# Altium PCB PCB1.PcbDoc
Units mm, origin at the board's own origin, x right, y up, seen from the top; angles counter-clockwise.
Board outline 40.51 x 73.91 mm, 2 copper layers (Top Layer, Bottom Layer), stack 1.671 mm thick; 26 components, 14 nets, 62 pads, 0 vias.
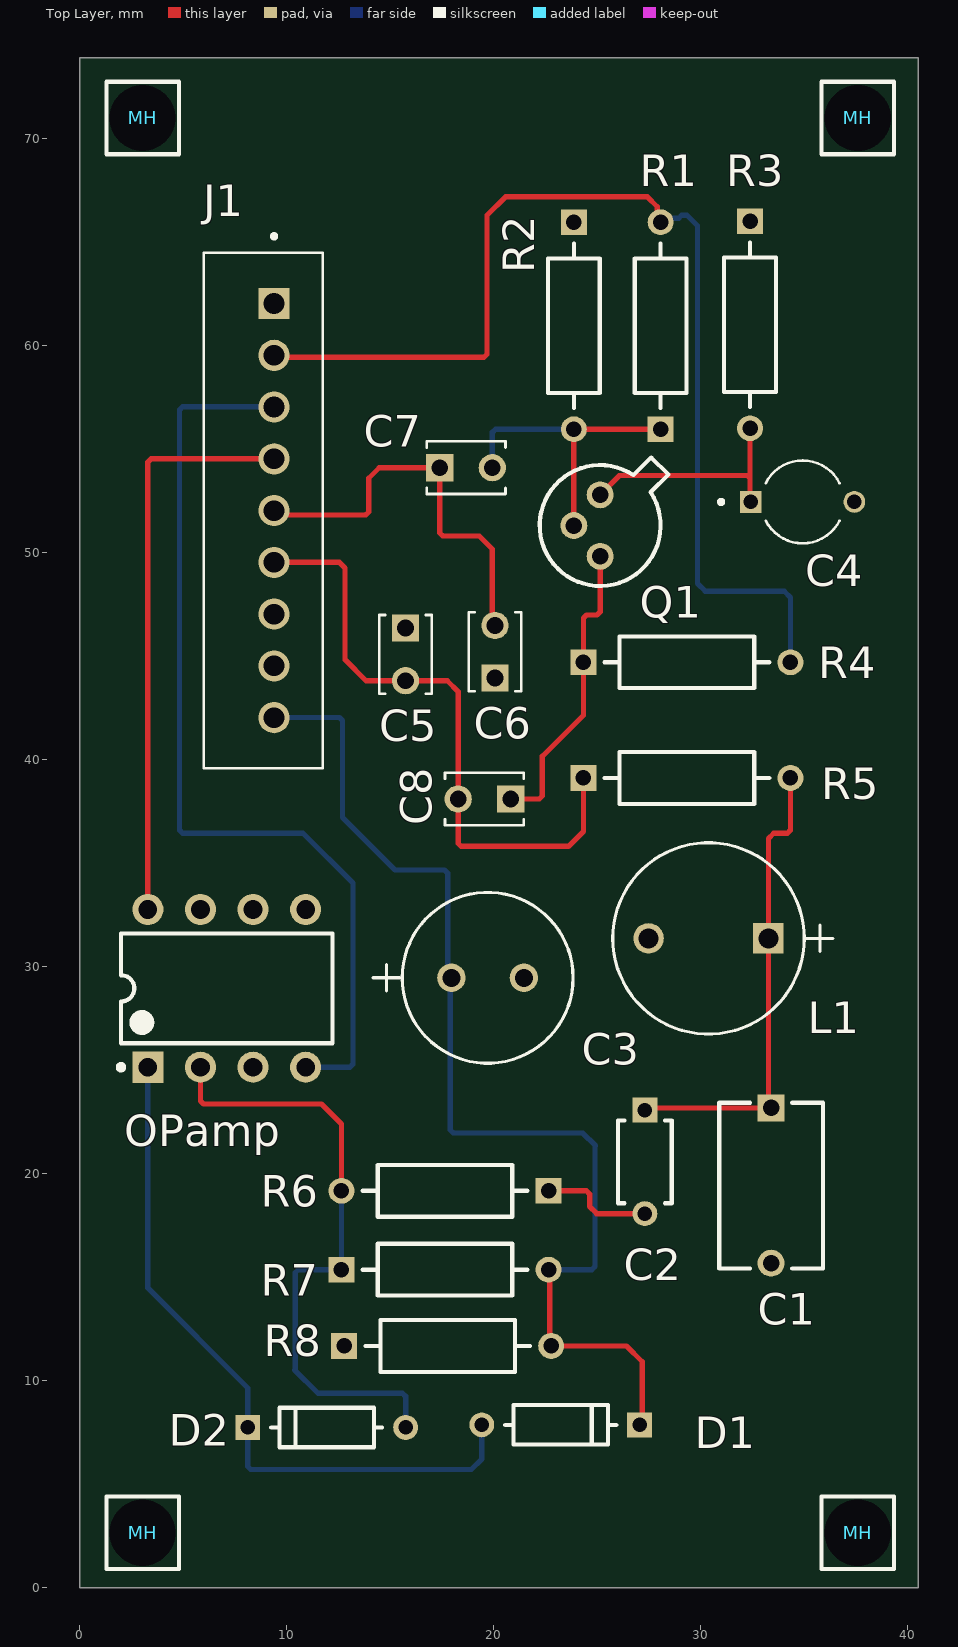
[diagram p0: Top Layer view]
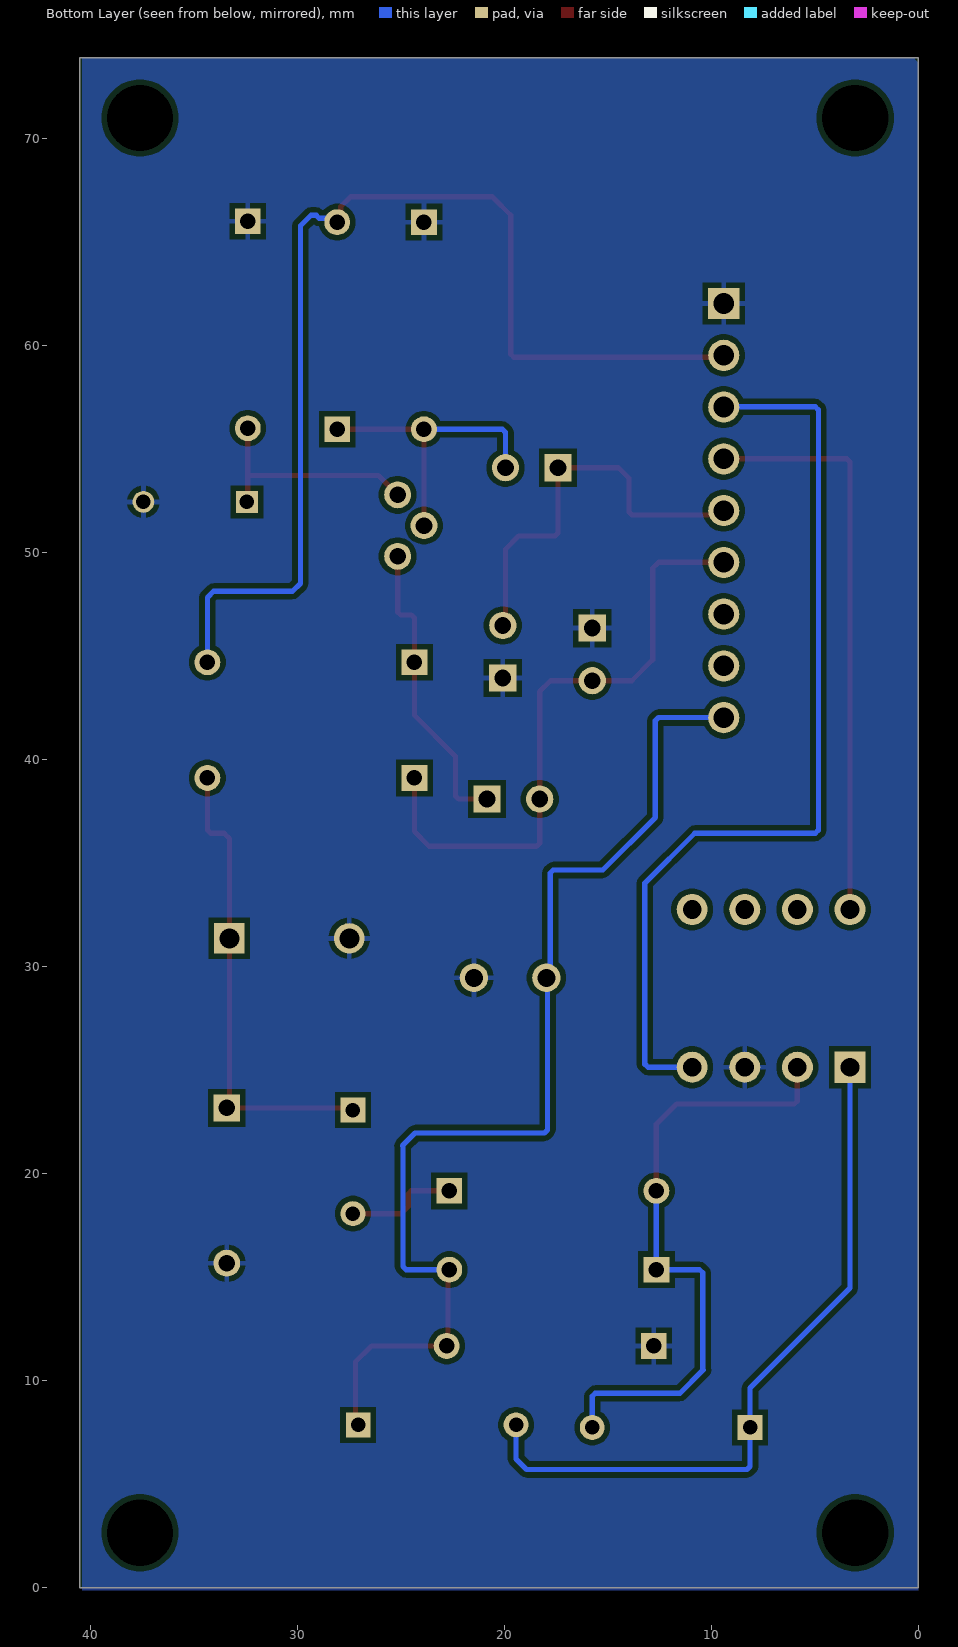
[diagram p1: Bottom Layer view, seen from below]
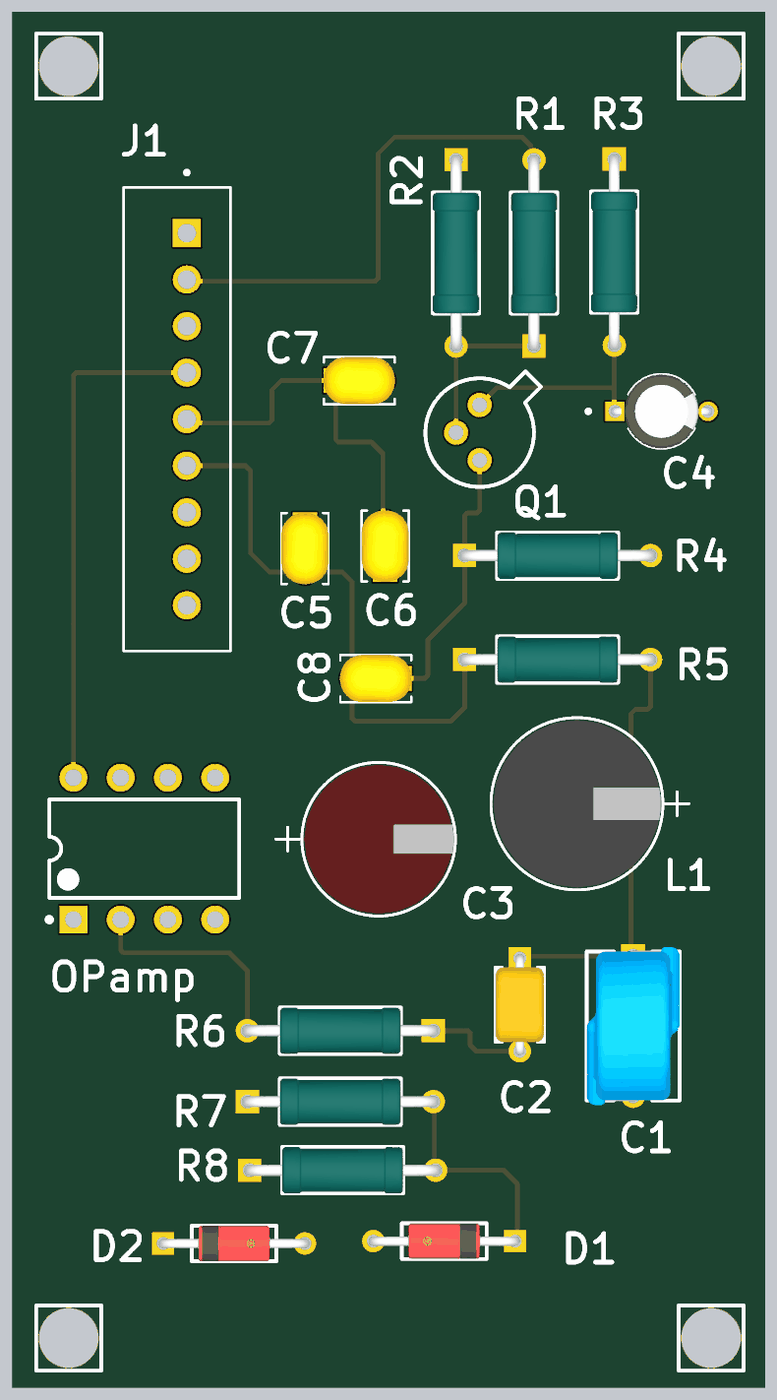
[diagram p2: 3D render of the assembled board from above, using the file's embedded part models]

## Layer stack, top to bottom
Top Solder: solder mask 0.0102, Solder Resist, Dk 3.5
Top Layer: signal copper 0.0356
Dielectric 1: dielectric 1.6, FR-4, Dk 4.8
Bottom Layer: signal copper 0.0356
Bottom Solder: solder mask 0.0102, Solder Resist, Dk 3.5

## Board outline
0,0 40.513,0 40.513,73.914 0,73.914

## Design rules (kind name [scope] priority, off if disabled: settings)
Clearance [All] p1: gap=0.254 ignorepadtopadclearanceinfootprint=FALSE ismatrix=TRUE
PolygonConnect [All] p1: connectstyle=Relief reliefconductorwidth=0.254 reliefentries=4 polygonreliefangle="90 Angle" airgapwidth=0.254
RoutingVias [All] p1: holewidth=0.711 width=1.27 viastyle="Through Hole" minholewidth=0.711 minwidth=1.27 maxholewidth=0.711 maxwidth=1.27
SilkToSolderMaskClearance [IsPad] p1: minsilkscreentomaskgap=0.1 clearancetoexposedcopper=TRUE
SolderMaskExpansion [All] p1: expansion=0.102 istentingtop=FALSE
SupplyNets "Schematic Supply Nets" [InNet('GND')] p1: voltage=0.000
Width [All] p1: maxlimit=0.254 minlimit=0.254 preferedwidth=0.254
29 further rules are at their usual default settings.

## Classes and differential pairs
component class CL_meter: C1 C2 C3 C4 C5 C6 C7 C8 D1 D2 J1 L1 MH OPamp Q1 R1 R2 R3 R4 R5 R6 R7 R8

## Components (designator, comment, footprint, x,y, rotation, side; value= is the part's Value field where it differs from the comment)
C1 "22pF" FP-DE2_D8_T5_F7_5_d0_6-0-MFG 33.401,19.431 r270 top
C2 "100nF" FP-K15H5-MFG 27.305,20.574 r270 top
C3 "47uF" 3 17.963,29.464 r0 top
C4 "10uF" 10uF 34.925,52.451 r0 top
C5 "22nF" CAPRR254W54L381T254H466 15.748,45.085 r270 top
C6 "22nF" CAPRR254W54L381T254H466 20.066,45.212 r90 top
C7 "47nF" CAPRR254W54L381T254H466 18.669,54.102 r0 top
C8 "47nF" CAPRR254W54L381T254H466 19.558,38.1 r180 top
D1 "1N4148" FP-017AG-MFG 23.241,7.874 r180 top
D2 "1N4148" FP-017AG-MFG 11.938,7.747 r0 top
J1 "B9B-XH-A" JST_B9B-XH-A 8.873,52.03 r90 top
L1 "1mH" IND_BOURNS_RLB9012 33.274,31.369 r180 top
MH "mounting hole 3.2mm" MH 3.048,2.667 r0 top
MH "mounting hole 3.2mm" MH 37.592,70.993 r0 top
MH "mounting hole 3.2mm" MH 37.592,2.667 r0 top
MH "mounting hole 3.2mm" MH 3.048,70.993 r0 top
OPamp "TL072CP" P0008A 7.112,28.956 r90 top
Q1 "2N2222" MLTC-TO-18-3 25.146,51.308 r270 top
R1 "10k" FP-MRS25-MFG 28.067,60.96 r90 top
R2 "8.2k" FP-MRS25-MFG 23.876,60.96 r270 top
R3 "1k" FP-MRS25-MFG 32.385,61.007 r270 top
R4 "1k" FP-MRS25-MFG 29.337,44.704 r0 top
R5 "1k" FP-MRS25-MFG 29.337,39.116 r0 top
R6 "1k" FP-MRS25-MFG 17.653,19.177 r180 top
R7 "15k" FP-MRS25-MFG 17.653,15.367 r0 top
R8 "1k" FP-MRS25-MFG 17.78,11.684 r0 top

## Footprints (in the part's own frame and the unit in brackets; to place one, negate y for a bottom-side part, rotate by r counter-clockwise, add the part's x,y. Pads: shape width x height; smd on the part's side, far side on the other; paste and mask are expansions set on the pad)
3 [mil]
  round 54 / inner round 60 / far side round 54 hole 34 paste-99999 mask+0: 1(0,0) 2(137.8,0)
  silkscreen extent -149,-162 231,162, body extent -89,-158 227,158, height 513
10uF [mm]
  round 1.05 hole 0.7: N(2.5,0)
  rect 1.05x1.05 hole 0.7: P(-2.5,0)
  silkscreen extent -4.04,-2 1.78,2, body extent -2.73,-2 2.73,2, height 7
CAPRR254W54L381T254H466 [mm]
  rect 1.318x1.318 / inner round 1.318 / far side rect 1.318x1.318 hole 0.81: 1(-1.27,0)
  round 1.318 hole 0.81: 2(1.27,0)
  silkscreen extent -1.91,-1.27 1.91,1.27, body extent -1.91,-1.27 1.91,1.27, height 4.66
FP-017AG-MFG [mm]
  rect 1.2x1.2 hole 0.7 paste-2539.97 mask+0: 1(-3.813,0)
  round 1.2 hole 0.7 paste-2539.97 mask+0: 2(3.813,0)
  silkscreen extent -2.68,-0.95 2.68,0.95, body extent -4.51,-1.05 4.51,1.05, height 0.25
FP-DE2_D8_T5_F7_5_d0_6-0-MFG [mm]
  rect 1.3x1.3 hole 0.8 paste-2539.97 mask+0: 1(-3.75,0)
  round 1.3 hole 0.8 paste-2539.97 mask+0: 2(3.75,0)
  silkscreen extent -4,-2.5 4,2.5, body extent -4.5,-2.6 4.5,2.6, height 0.25
FP-K15H5-MFG [mm]
  rect 1.2x1.2 hole 0.7 paste-2539.97 mask+0: 1(-2.5,0)
  round 1.2 hole 0.7 paste-2539.97 mask+0: 2(2.5,0)
  silkscreen extent -2,-1.3 2,1.3, body extent -3.2,-1.4 3.2,1.4, height 0.25
FP-MRS25-MFG [mm]
  rect 1.25x1.25 hole 0.75 paste-2539.97 mask+0: 1(-5,0)
  round 1.25 hole 0.75 paste-2539.97 mask+0: 2(5,0)
  silkscreen extent -3.98,-1.25 3.98,1.25, body extent -5.72,-1.35 5.72,1.35, height 0.25
IND_BOURNS_RLB9012 [mil]
  rect 58x58 / inner round 60 / far side rect 58x58 hole 38 paste-99999 mask+0: 1(0,0)
  round 58 / inner round 60 / far side round 58 hole 38 paste-99999 mask+0: 2(228,0)
  silkscreen extent -123,-182 296,182, body extent -63,-177 291,177, height 481
JST_B9B-XH-A [mm]
  rect 1.508x1.508 / inner round 1.508 / far side rect 1.508x1.508 hole 1: 1(10,-0.525)
  round 1.508 hole 1: 2(7.5,-0.525) 3(5,-0.525) 4(2.5,-0.525) 5(0,-0.525) 6(-2.5,-0.525) 7(-5,-0.525) 8(-7.5,-0.525) 9(-10,-0.525)
  silkscreen extent -12.45,-2.88 13.35,2.88
MH [mm]
  round 1 hole 3.2: ""(0,0)
  silkscreen extent -1.75,-1.75 1.75,1.75
MLTC-TO-18-3 [mm] "TO-18, 3-Leads"
  round 1.3 hole 0.8: 1(-1.485,0) 2(0,-1.27) 3(1.485,0)
  silkscreen extent -3.29,-2.92 2.92,3.29, body extent -3.29,-2.93 2.93,3.29, height 5.33
P0008A [mm] "DIP, 8-Leads, Body 10.15x6.6mm, Pitch 2.54mm"
  rect 1.5x1.5 hole 0.9: 1(-3.81,3.81)
  round 1.5 hole 0.9: 2(-3.81,1.27) 3(-3.81,-1.27) 4(-3.81,-3.81) 5(3.81,-3.81) 6(3.81,-1.27) 7(3.81,1.27) 8(3.81,3.81)
  silkscreen extent -3.93,-5.1 2.65,5.23, body extent -3.95,-5.07 3.95,5.07, height 5.08

## Part data
C1: library part CMP-00260-30861572-1, "DE21XKY220JN3AM02F Cap Ceramic Disc 22pF 250VAC 5% Thru-Hole Ammo Pack", Case/Package=Radial, Manufacturer Lifecycle Status=NRND, Max Operating Temperature=85°C, Min Operating Temperature=20°C, Ratings="X1, Y2", Tolerance=5%, Capacitance=22pF, Height - Seated (Max)=10.9982mm, Lead Pitch=7.493mm, Lead/Base Style=Straight, Lifecycle Status=NRND, Mount="Through Hole", NexarPartId=30861572, Packaging="Cut Tape (CT)", RoHS=Compliant
C2: library part CMP-02417-000078-1, "CAP CER 0.1UF 50V X7R RADIAL", Case/Package=Dipped, Dielectric=X7R, Dielectric Material=Ceramic, Max Operating Temperature=125°C, Min Operating Temperature=-55°C, Package Quantity=1, Tolerance=10%, Voltage=50V, Capacitance=100nF, Construction=RADIAL, Depth=2.5mm, Diameter=500um, Height=4mm, Height - Seated (Max)=0.257inch, Lead Diameter=0.5mm, Lead Free="Lead Free", Lead Length=30mm, Lead Pitch=5mm, Lead/Base Style="Formed Leads", Length=4mm, Mount="Through Hole", Packaging="Tape and Reel", Radiation Hardening=No, RoHS Compliant=Yes, Series=K, Termination=Radial, Thickness=2.6mm, Voltage Rating=50V, Voltage Rating (DC)=50V, Weight=0.005644oz, Width=2.5mm
C3: library part UVK2A470MPD1TD, "No Description Available", Mfr_Name=Nichicon
C4: "Cap Aluminum Lytic 10uF 25V 20% (4 X 7mm) Radial 5mm 28mA 1000h 85Â°C Ammo Pack", Package="RADIAL-2 Panasonic", Availability="No availability data", Check_prices=https://www.snapeda.com/parts/ECEA1EKA100B/Panasonic/view-part/5784962/?ref=eda, MF=Panasonic, MP=ECEA1EKA100B, Price=None, SnapEDA_Link=https://www.snapeda.com/parts/ECEA1EKA100B/Panasonic/view-part/5784962/?ref=snap
C5 C6: library part C315C223K5R5TA, "315 C 22nF Ceramic Multilayer Capacitor, 50 VDC, +125degC, X7R Dielec, +/-10%", Package="Radial Kemet", Check_prices=https://www.snapeda.com/parts/C315C223K5R5TA/KEMET/view-part/?ref=eda, MF=KEMET, MP=C315C223K5R5TA, SnapEDA_Link=https://www.snapeda.com/parts/C315C223K5R5TA/KEMET/view-part/?ref=snap
C7 C8: library part C315C473M5U5TA, "315 C 47nF Ceramic Multilayer Capacitor, 50 VDC, +85degC, Z5U Dielectric, +/-20%", Package="Radial Kemet", Check_prices=https://www.snapeda.com/parts/C315C473M5U5TA/KEMET/view-part/?ref=eda, MF=KEMET, MP=C315C473M5U5TA, SnapEDA_Link=https://www.snapeda.com/parts/C315C473M5U5TA/KEMET/view-part/?ref=snap
D1 D2: library part CMP-07163-000046-1, "DIODE GEN PURP 100V 200MA DO35", Average Rectified Current=200mA, Capacitance=4pF, Case/Package=DO-35, Current=4A, Forward Current=300mA, Forward Voltage=1V, Max Forward Surge Current (Ifsm)=1A, Max Operating Temperature=175°C, Max Power Dissipation=500mW, Max Repetitive Reverse Voltage (Vrrm)=100V, Max Reverse Current=5uA, Min Operating Temperature=-65°C, Package Quantity=2000, Contact Plating=Tin, Current Rating=200mA, Diameter=1.91mm, Element Configuration=Single, Height=4.56mm, Lead Free="Lead Free", Length=4.56mm, Max Reverse Voltage (DC)=100V, Max Surge Current=4A, Mount="Through Hole", Number of Pins=2, Output Current=200mA, Outside Diameter=1.85mm, Packaging=Bulk, Peak Non-Repetitive Surge Current=4A, Polarity=Standard, Power Dissipation=500mW, Radiation Hardening=No, REACH SVHC="No SVHC", Recovery Time=4ns, Reverse Recovery Time=4ns, Reverse Voltage=100V, Series=-, Voltage=100V, Voltage Rating (DC)=100V, Weight=0.01lb, Width=1.91mm
J1: Package=None, Availability=Unavailable, MF="{'manufacturer': u'JST Sales America Inc.'}", MP=B9B-XH-A, Price=None
L1: library part RLB9012-102KL, "No Description Available", Mfr_Name="Bourns Electronics"
MH MH MH MH: library part MH3P2
OPamp: library part CMP-0017-00950-2, "Dual Low-Noise JFET-Input General-Purpose Operational Amplifier, 7 to 36 V, 0 to 70 degC, 8-pin DIP (P8), Pb-Free (RoHS)", Manufacturer="Texas Instruments", Rating=Catalog, Total Supply Voltage(Max)(+5V is 5, +/-5V is 10)=36, Total Supply Voltage(Min)(+5V is 5, +/-5V is 10)=7, CMRR(Min)(dB)=70, Code_JEDEC=MS-001, ComponentLink1Description="Manufacturer URL", ComponentLink1URL=http://www.ti.com/, ComponentLink2Description=Datasheet, ComponentLink2URL=http://www.ti.com/lit/ds/symlink/tl072.pdf, ComponentLink3Description="Package Specification", ComponentLink3URL=http://www.ti.com/litv/pdf/mpdi001b, DatasheetVersion=SLOS080J, Eco-Plan="Pb-Free (RoHS)", GBW(Typ)(MHz)=3, IIB(Max)(pA)=200, Iq per channel(Max)(mA)=2.5, Mounting Technology="Through Hole", Number of Channels=2, Offset Drift(Typ)(uV/C)=18, PackageDescription="8-Pin Plastic In-Line, Body 9.59 x 6.35 mm, Pitch 2.54 mm", PackageReference=P0008A, PackageVersion="4040082/E, 04/2010", PartNumber=TL072CP, Slew Rate(Typ)(V/us)=13, Sub Family="General Purpose Amplifier, High Supply Voltage Amplifier (>=30V)", Vio (25C)(Max)(mV)=10, Vn at 1kHz(Typ)(nV/rtHz)=18
Q1: library part CMP-2000-05237-1, "Low Power Bipolar NPN Transistor, 30 V, -65 to 200 degC, 3-Pin TO-18, RoHS, Bulk", Collector Emitter Voltage V(br)ceo=30V, Collector Emitter Voltage Vces=400mV, Continuous Collector Current Ic Max=800mA, Current Ic @ Vce Sat=150mA, DC Current Gain hFE=100, Full Power Rating Temperature=25degC, Manufacturer=Multicomp, Package / Case=TO-18, Package Description="3-Pin Transistor Outline Package (TO-18), Dia 5.54 mm, Pitch Pitch 1.485mm", Package Reference=TO-18-3, Power Dissipation Pd=500mW, Voltage Vcbo=60V, Current Ic Continuous a Max=800mA, Current Ic hFE=150mA, Datasheet URL=http://www.farnell.com/datasheets/1662272.pdf, Datasheet Version="Rev. 1.1, 05/2012", DC Collector Current=800mA, Gain Bandwidth ft Min=250MHz, Gain Bandwidth ft Typ=250MHz, Hfe Min=100, Manufacturer URL=http://uk.farnell.com/b/multicomp, No. of Pins=3, No. of Transistors=1, Pin Configuration=a, Power Dissipation Ptot Max=500mW, SVHC=NoSVHC(19-Dec-2012), Transistor Case Style=TO-18, Transistor Polarity=NPN
R1 R2 R3 R4 R5 R6 R7 R8: library part CMP-00030-42757237-1, Case/Package=Axial, Max Operating Temperature=155°C, Max Power Dissipation=600mW, Min Operating Temperature=-55°C, Resistance=100Ω, Temperature Coefficient=50ppm/°C, Tolerance=1%, Voltage Rating=350V, Composition="Metal Film, Thin Film", Contact Plating=Tin, Diameter=2.5mm, Lead Diameter=600µm, Lead Free="Lead Free", Length=6.5mm, Military Standard=Not, Mount="Through Hole", NexarPartId=42757237, Number of Pins=2, Number of Terminations=2, Packaging="Tape & Reel (TR)", Power Rating=600mW, Radiation Hardening=No, REACH SVHC=Unknown, RoHS=Compliant, Schedule B="8533210090, 8533210090", Termination=Axial, Voltage Rating (DC)=350V, Width=2.5mm

## Nets (pads, with @x,y where several pads share a name; then routed paths per layer and width w, separated by ;. In a path a pad name is that pad's centre, name@x,y a point inside that pad or via, vN(x,y) a via of type N, cw(c..) or ccw(c..) an arc to the next point about the centre after c; other vN are vias at no path point)
GND: C1.2 C3.2 C4.N C5.1 C6.1 J1.1 L1.2 OPamp.3 R2.1 R3.1 R8.1
NetC1_1: C1.1 C2.1 L1.1 R5.2 | length 23
  Top Layer w0.254: C2.1 27.412,23.181 C1.1 33.274,23.308 L1.1 33.274,36.195 33.528,36.449 34.188,36.449 34.337,36.598 R5.2
NetC2_2: C2.2 R6.1 | length 5.5
  Top Layer w0.254: R6.1 24.489,19.177 24.638,19.028 24.638,18.415 24.979,18.074 C2.2
NetC3_1: C3.1 D1.1 J1.9 R7.2 R8.2 | length 53.8
  Top Layer w0.254: R7.2 22.717,15.303 22.717,11.747 R8.2 26.416,11.684 27.178,10.922 27.178,7.998 D1.1
  Bottom Layer w0.254: J1.9 9.405,42.037 12.551,42.037 12.7,41.888 12.7,37.211 15.24,34.671 17.631,34.671 17.78,34.522 17.78,29.647 C3.1 17.907,29.408 17.907,22.12 18.056,21.971 24.301,21.971 24.914,21.358 24.892,21.336 24.892,15.516 24.743,15.367 R7.2
NetC4_P: C4.P Q1.1 R3.2 | length 11.5
  Top Layer w0.254: Q1.1@25.429,52.793 Q1.1 26.074,53.721 32.258,53.721 32.385,53.594 ; R3.2 32.385,53.594 ; C4.P 32.385,52.491 32.385,53.594
NetC5_2: C5.2 C8.2 J1.6 R5.1 | length 30.4
  Top Layer w0.254: J1.6 12.551,49.53 12.827,49.254 12.827,44.831 13.843,43.815 C5.2 17.758,43.815 18.288,43.285 C8.2 18.288,35.963 18.437,35.814 23.622,35.814 24.337,36.529 R5.1
NetC6_2: C6.2 C7.1 J1.5 | length 19.7
  Top Layer w0.254: J1.5 9.612,51.816 13.821,51.816 13.97,51.965 13.97,53.594 14.478,54.102 C7.1 17.399,50.949 17.548,50.8 19.304,50.8 19.939,50.165 19.939,46.609 C6.2
NetC7_2: C7.2 Q1.2 R1.1 R2.2 | length 14.6
  Top Layer w0.254: Q1.2 R2.2 R1.1
  Bottom Layer w0.254: C7.2 19.939,55.811 20.088,55.96 R2.2
NetC8_1: C8.1 Q1.3 R4.1 | length 14.6
  Top Layer w0.254: C8.1 22.203,38.1 22.352,38.249 22.352,40.16 24.337,42.145 R4.1 24.337,46.841 24.486,46.99 24.997,46.99 25.146,47.139 Q1.3
NetD1_2: D1.2 D2.1 OPamp.1 | length 34.5
  Bottom Layer w0.254: OPamp.1 3.302,14.478 8.128,9.652 8.128,7.75 D2.1 8.125,5.864 8.274,5.715 18.923,5.715 19.431,6.223 19.431,7.871 D1.2
NetD2_2: D2.2 OPamp.2 R6.2 R7.1 | length 30.3
  Top Layer w0.254: OPamp.2 5.842,23.517 5.991,23.368 11.684,23.368 12.653,22.399 R6.2
  Bottom Layer w0.254: R6.2 R7.1 10.563,15.367 10.414,15.218 10.414,10.541 10.392,10.519 11.513,9.398 15.602,9.398 15.751,9.249 D2.2
NetJ1_2: J1.2 R1.2 R4.2 | length 54
  Top Layer w0.254: J1.2 9.492,59.436 19.536,59.436 19.685,59.585 19.685,66.294 20.574,67.183 27.427,67.183 27.901,66.709 27.901,66.126 R1.2
  Bottom Layer w0.254: R1.2 28.258,66.151 28.94,66.151 29.083,66.294 29.337,66.294 29.845,65.786 29.845,48.514 30.226,48.133 34.036,48.133 34.337,47.832 R4.2
NetJ1_3: J1.3 OPamp.4 | length 45.5
  Bottom Layer w0.254: J1.3 9.383,57.045 4.975,57.045 4.826,56.896 4.826,36.598 4.975,36.449 10.795,36.449 13.208,34.036 13.208,25.295 13.059,25.146 OPamp.4
NetJ1_4: J1.4 OPamp.8 | length 27.8
  Top Layer w0.254: OPamp.8 3.302,54.381 3.451,54.53 J1.4
pads on no net: J1.7 J1.8 MH. OPamp.5 OPamp.6 OPamp.7

## Polygon pours and split planes (outlines as drawn)
GND on Bottom Layer "GND_L02_P000" (solid, pour order 0): 0,73.787 0.127,73.914 40.386,73.914 40.386,-0.127 0,-0.127 0,73.66 0.127,73.787